# Altium PCB PCB_INDICATOR_DELAROSA_REV2_.PcbDoc
Units mm, origin at the board's own origin, x right, y up, seen from the top; angles counter-clockwise.
Board outline 78.61 x 49.91 mm, 2 copper layers (Top Layer, Bottom Layer), stack 1.57 mm thick; 40 components, 20 nets, 116 pads, 123 vias.
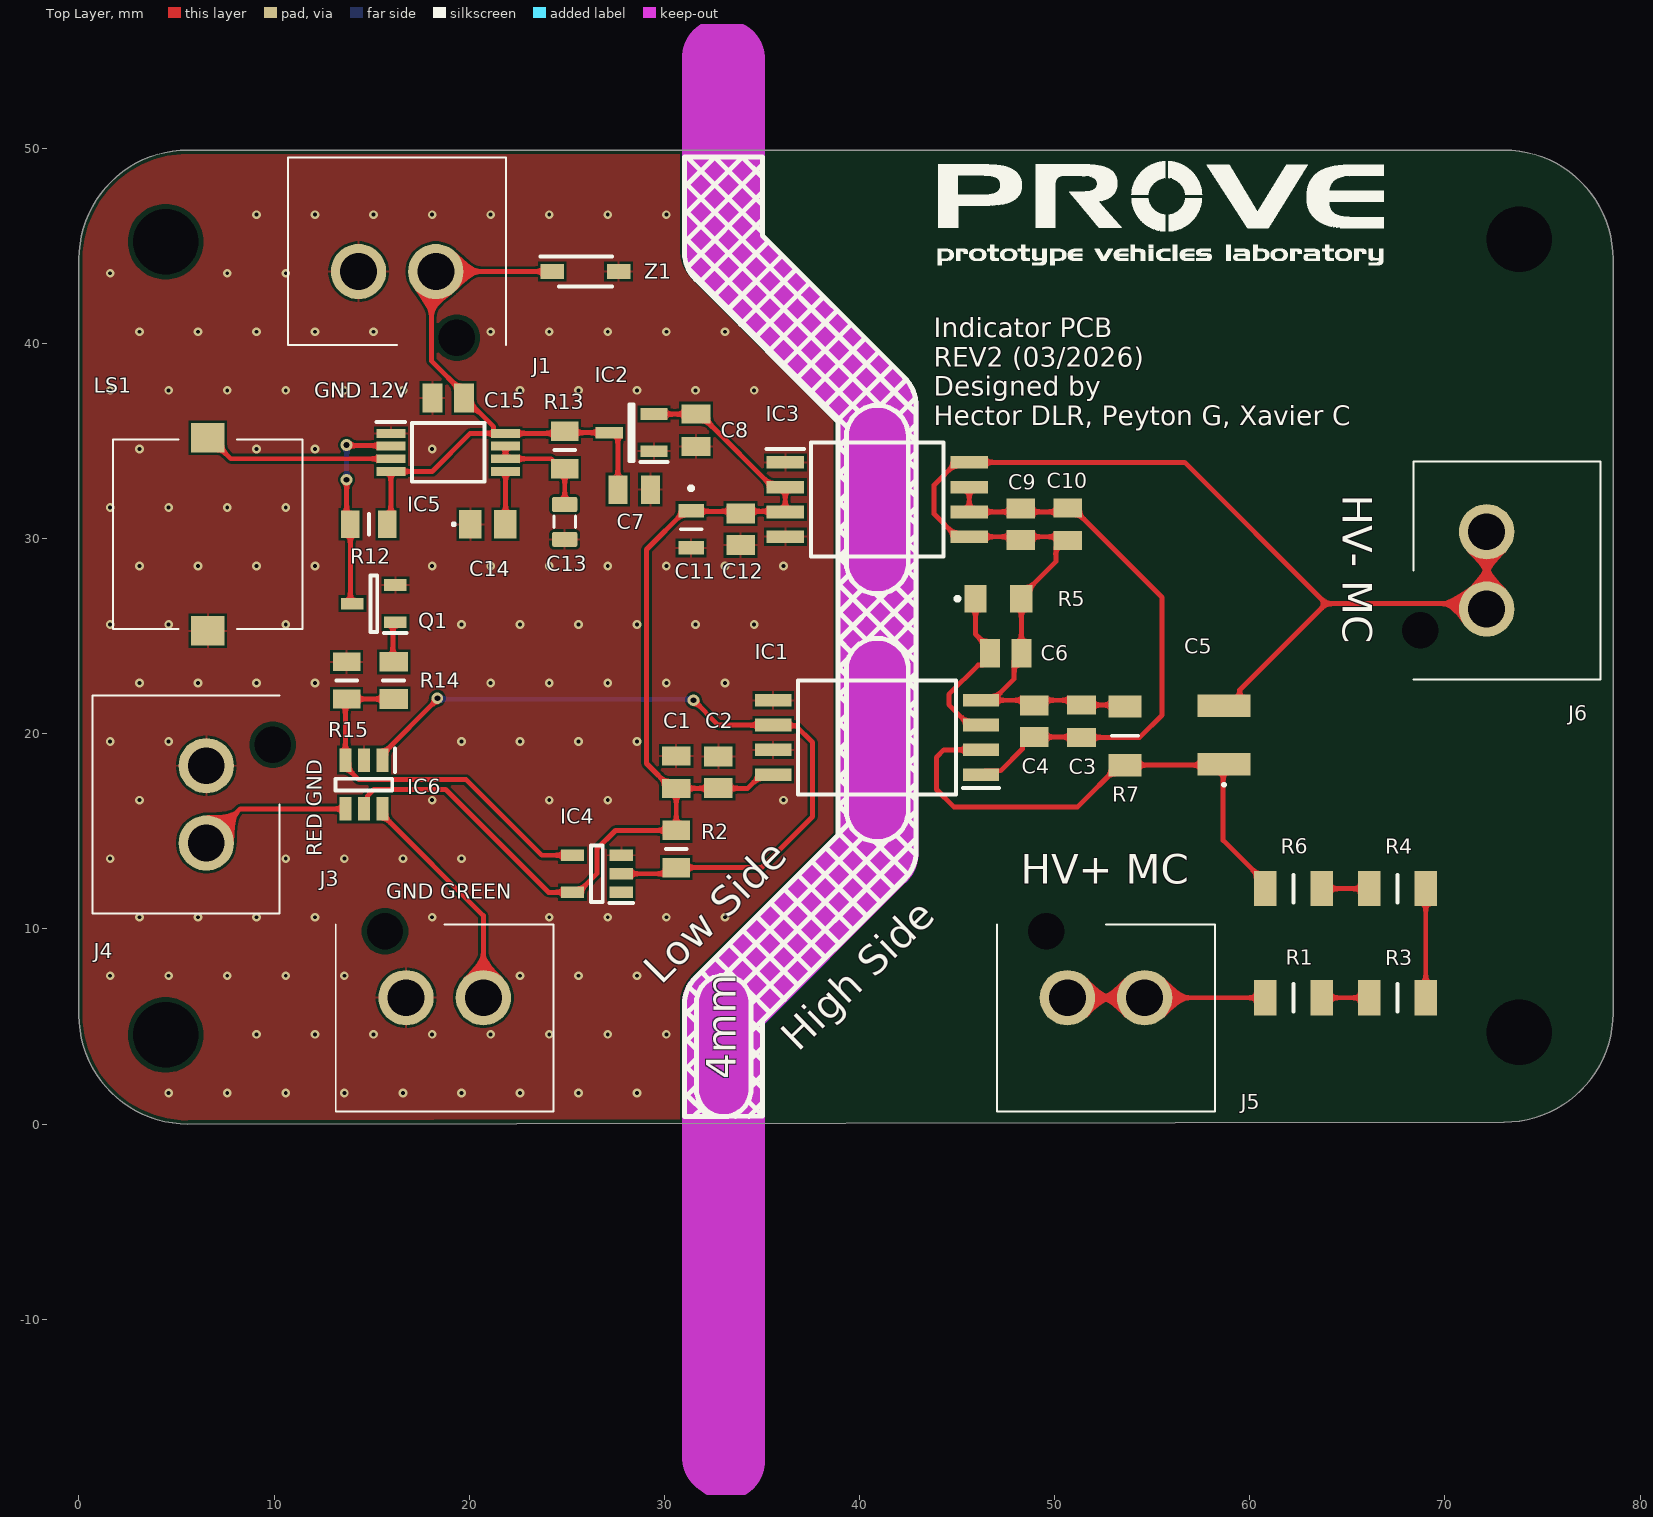
[diagram p0: Top Layer view]
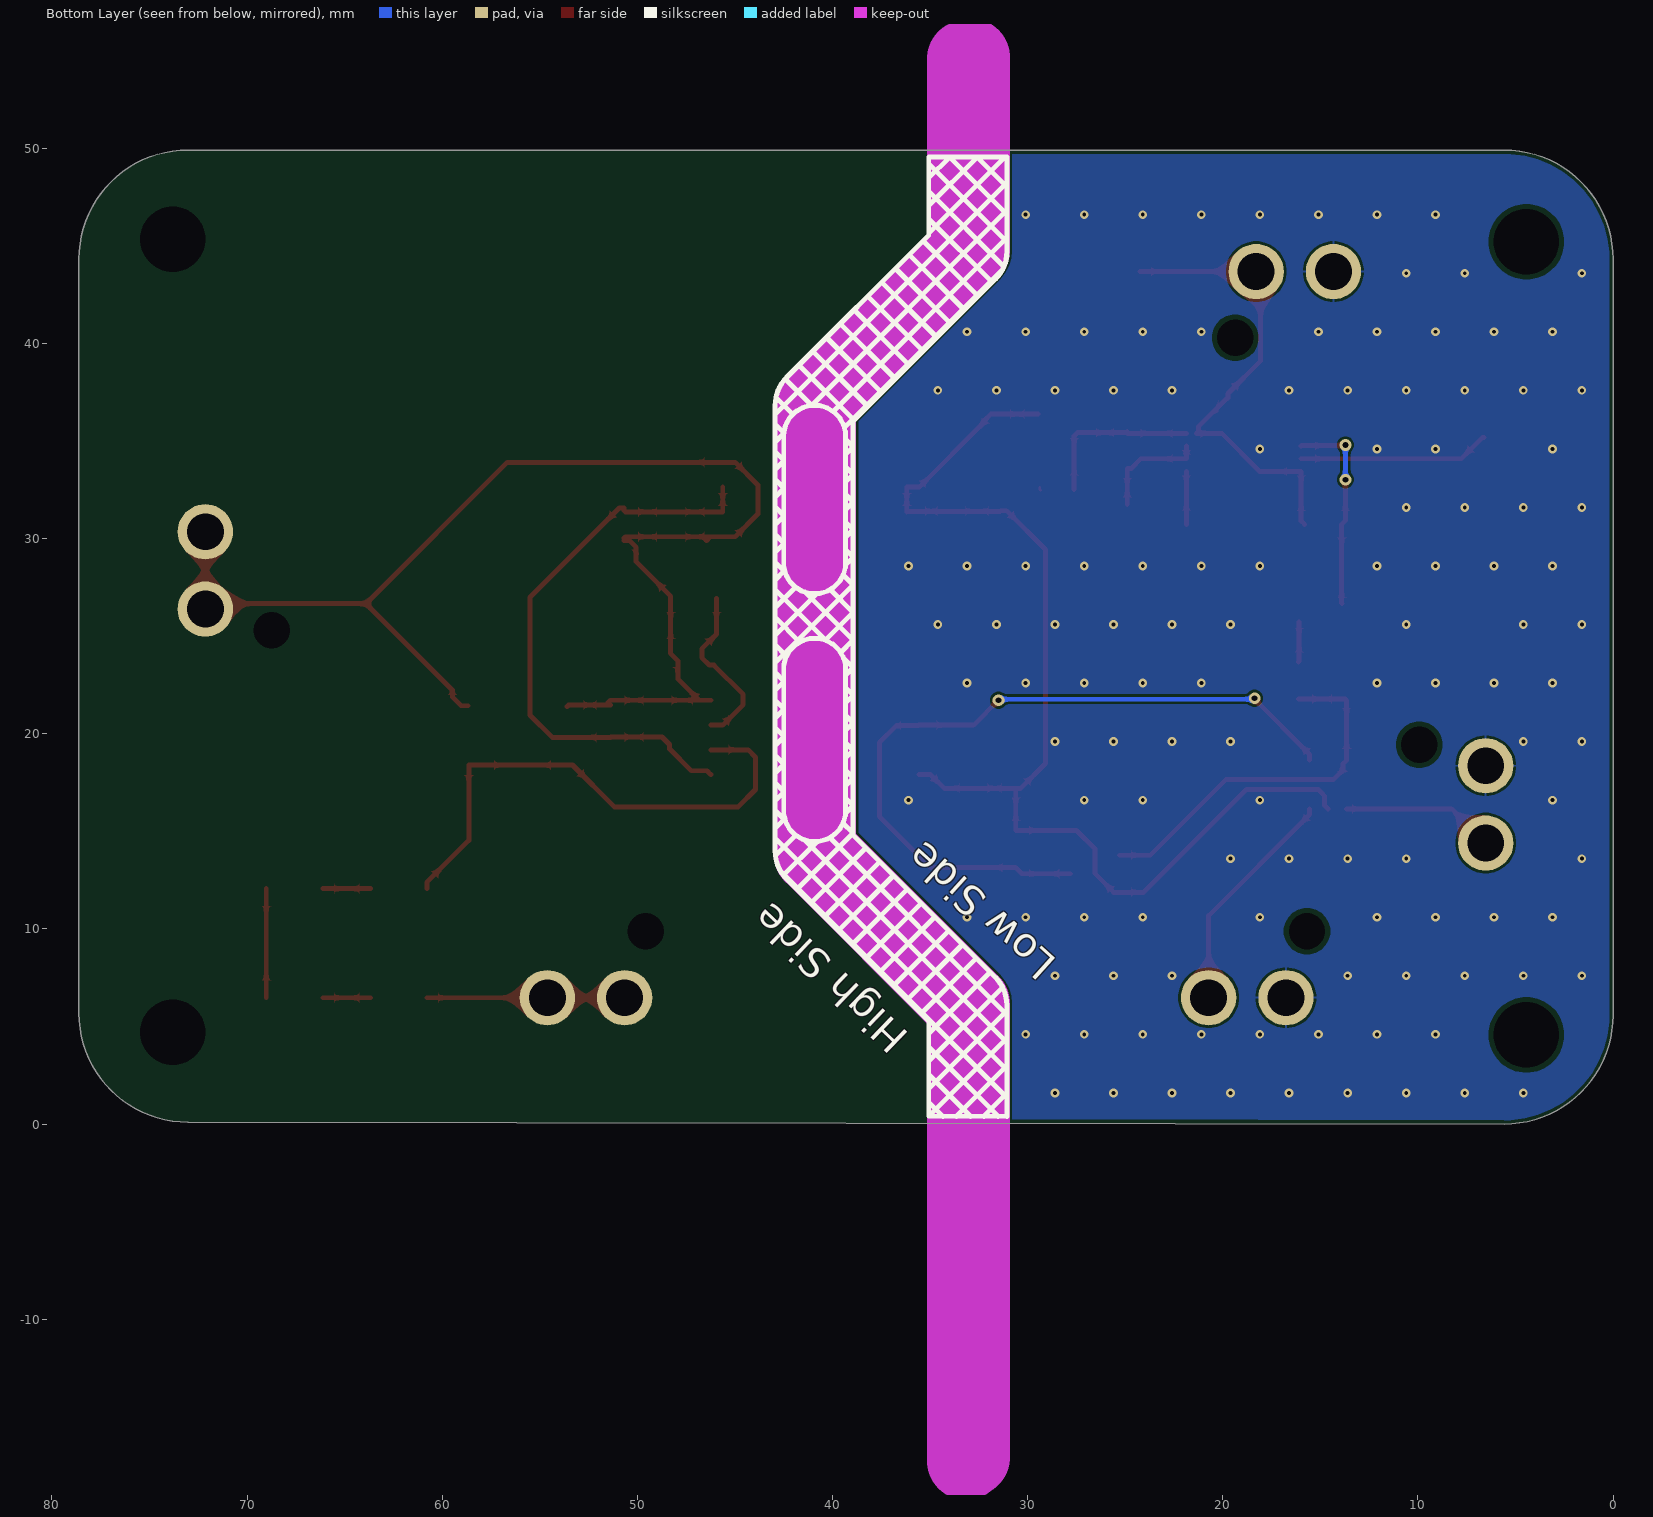
[diagram p1: Bottom Layer view, seen from below]
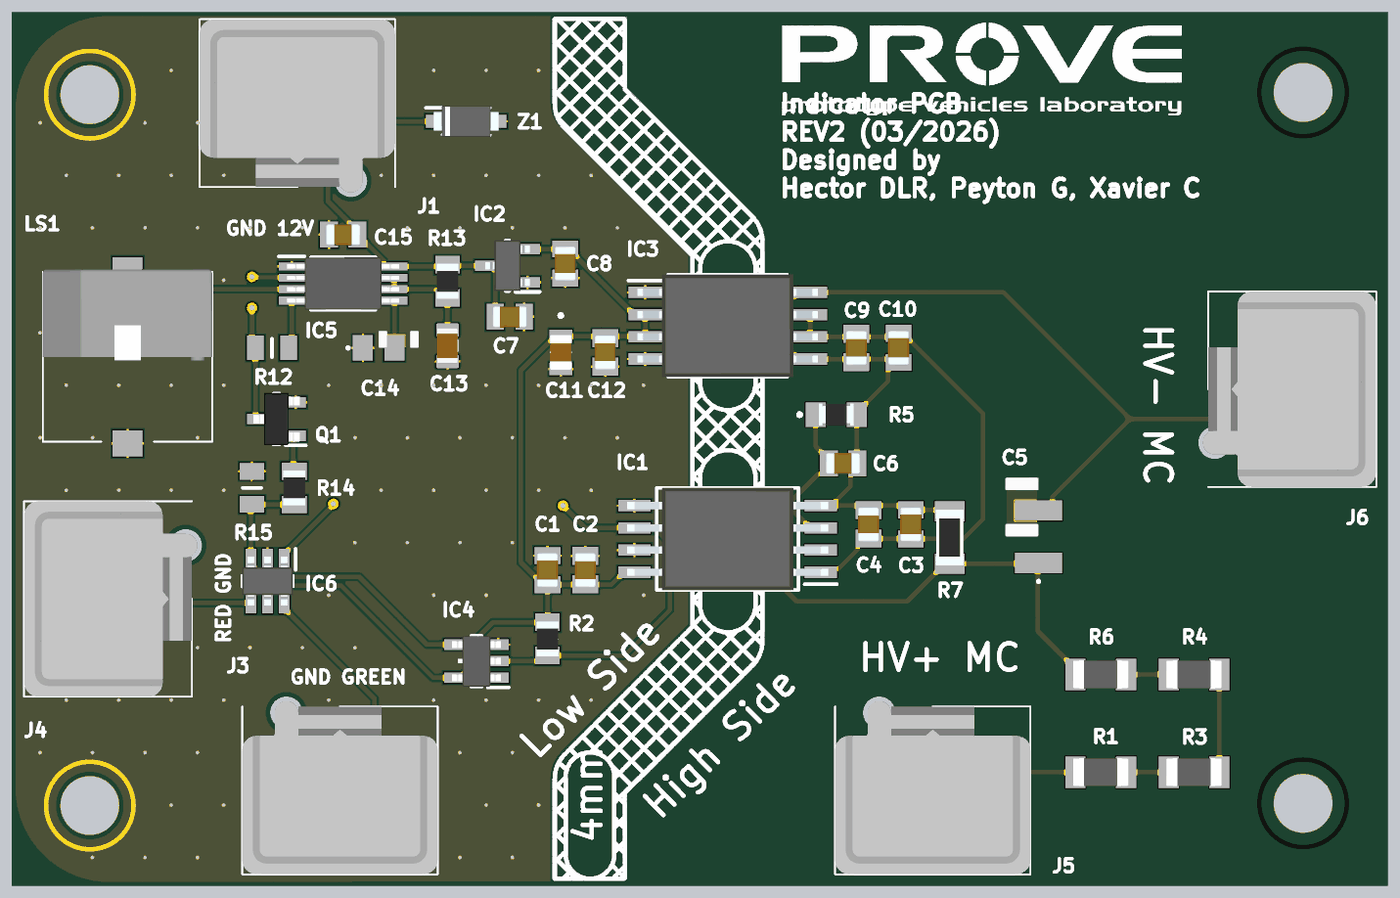
[diagram p2: 3D render of the assembled board from above, using the file's embedded part models]

## Layer stack, top to bottom
Top Solder: solder mask 0.0127, Solder Resist, Dk 3.8
Top Layer: signal copper 0.035
Dielectric: core 1.5, FR-4, Dk 4.5
Bottom Layer: signal copper 0.035
Bottom Solder: solder mask 0.0127, Solder Resist, Dk 3.8

## Board outline
0,5.588 0,44.323 cw(c5.588,44.323) 5.588,49.911 73.025,49.911 cw(c73.025,44.323) 78.613,44.323 78.613,5.685 cw(c73.025,5.685) 73.025,0.097 5.588,0 cw(c5.588,5.588)
cut-out: 39.663,28.765 ccw(c40.914,28.765) 42.164,28.765 42.164,35.242 ccw(c40.914,35.242) 39.663,35.242
cut-out: 39.663,16.066 ccw(c40.914,16.066) 42.164,16.066 42.164,23.304 ccw(c40.914,23.304) 39.663,23.304

## Design rules (kind name [scope] priority, off if disabled: settings)
BoardOutlineClearance [All] p1: gap=0.2 ignorepadtopadclearanceinfootprint=FALSE
Clearance [All] p1: gap=0.127 ignorepadtopadclearanceinfootprint=FALSE except(0.25: Arc-Hole Track-Hole SMDPad-Hole THPad-Hole Via-Hole Fill-Hole Poly-Hole Region-Hole Text-Hole)
ComponentClearance [All] p1: gap=0.127 collisioncheckmode=3 verticalgap=0.127 showdistances=TRUE
DiffPairsRouting [All] p1: maxlimit=0.254 minlimit=0.127 mostfreqgap=0.127 toplayer_minwidth=0.127 toplayer_maxwidth=25.4 toplayer_prefwidth=0.127 bottomlayer_minwidth=0.127 bottomlayer_maxwidth=25.4 bottomlayer_prefwidth=0.127 maxuncoupledlength=12.7
Height [All] p1: minheight=0 maxheight=1816.048 prefheight=12.7
HoleSize [All] p1: absolutevalues=TRUE maxlimit=6.3 minlimit=0.3 maxpercent=80.000 minpercent=20.000
HoleToHoleClearance [All] p1: gap=0.25 allowstackedmicrovias=FALSE
MinimumAnnularRing [All] p1: minimumring=0.076
MinimumSolderMaskSliver [All] p1: minsoldermaskwidth=0
PlaneClearance [All] p1: clearance=0.127
PlaneConnect PlaneConnectPowerPads [InPadClass('PowerPads')] p1: planeconnectstyle=Direct reliefexpansion=0.508 reliefentries=4 reliefconductorwidth=0.254 reliefairgap=0.254
PlaneConnect [All] p2: pad.planeconnectstyle=Relief pad.reliefexpansion=0.3 pad.reliefentries=4 pad.reliefconductorwidth=0.127 pad.reliefairgap=0.127 via.planeconnectstyle=Direct via.reliefexpansion=0.3 via.reliefentries=4 via.reliefconductorwidth=0.127 via.reliefairgap=0.127
PolygonConnect PolygonConnectPowerPads [All vs (InPadClass('PowerPads'))] p1: connectstyle=Direct reliefconductorwidth=0.254 reliefentries=4 polygonreliefangle="90 Angle" airgapwidth=0.254
PolygonConnect [All] p2: thpad.connectstyle=Relief thpad.reliefconductorwidth=0.127 thpad.reliefentries=4 thpad.polygonreliefangle="90 Angle" thpad.airgapwidth=0.127 smdpad.connectstyle=Relief smdpad.reliefconductorwidth=0.127 smdpad.reliefentries=4 smdpad.polygonreliefangle="90 Angle" smdpad.airgapwidth=0.127 via.connectstyle=Direct via.reliefconductorwidth=0.127 via.reliefentries=4 via.polygonreliefangle="90 Angle" via.airgapwidth=0.127
RoutingVias [All] p1: holewidth=0.3 width=0.6 viastyle="Through Hole" minholewidth=0.3 minwidth=0.6 maxholewidth=0.6 maxwidth=6.6
SilkToSilkClearance [All] p1: silktosilkclearance=0
SilkToSolderMaskClearance [IsPad] p1: minsilkscreentomaskgap=0.127 clearancetoexposedcopper=TRUE
SolderMaskExpansion [All] p1: expansion=0.075 istentingtop=FALSE
SupplyNets "Schematic Supply Nets" [InNet('GND')] p1: voltage=0.000
Width [All] p1: maxlimit=25.4 minlimit=0.127 preferedwidth=0.127 minimp=50.000000 maximp=50.000000 favimp=50.000000
20 further rules are at their usual default settings.

## Classes and differential pairs
component class "LED Logic": IC4 IC6 IC?
component class "555 Timer One-Shot": C13 C14 C15 IC5 LS1 Q1 R12 R13 R14 R15
component class "This is my D (Isolator) Schematic Document": C9 C10 C11 C12 IC3
component class "This is my C LDO (12V-5V) Schematic Document": C7 C8 IC2
component class "This is my A (AMC23C11) Schematic Document": C1 C2 C3 C4 C5 C6 IC1 R1 R2 R3 R4 R5 R6 R7
component class "This is my  B Connector Schematic Document": J1 J3 J4 J5 J6 Z1

## Components (designator, comment, footprint, x,y, rotation, side; value= is the part's Value field where it differs from the comment)
C1 "1u" CAPC2012X145N 30.607,18.034 r90 top
C2 "100n" CAPC2012X147N 32.766,18.034 r90 top
C3 "1u" CAPC2012X145N 51.372,20.645 r90 top
C4 "100n" CAPC2012X147N 48.959,20.645 r90 top
C5 "1nF" C1210 58.674,19.939 r90 top
C6 "100n" CAPC2012X147N 47.498,24.13 r0 top
C7 "1u" CAPC2012X145N 28.448,32.512 r0 top
C8 "1u" CAPC2012X145N 31.623,35.56 r90 top
C9 "100n" CAPC2012X147N 48.26,30.734 r270 top
C10 "22u" CAPC2012X145N 50.673,30.739 r270 top
C11 "10u" GRM21BR60J226ME39L 31.369,30.48 r270 top
C12 "100n" CAPC2012X147N 33.909,30.48 r270 top
C13 "Capacitor 100µF +/-20% 6.3V 0805" CAPC0805(2012)145_L 24.892,30.861 r90 top value=100µF
C14 "10nF" C0805 20.955,30.734 r0 top
C15 "100n" CAPC2012X147N 18.923,37.211 r180 top
IC1 "AMC23C11DWV" SOIC127P1150X280-8N 40.903,19.812 r180 top
IC2 "MCP1703AT-5002E_CB" SOT95P255X145-3N 28.321,35.433 r180 top
IC3 "MIE05W0505BGYE-3R-Z" SOIC127P1030X265-8N 40.907,32.004 r0 top
IC4 "SN74LVC1G04MDBVREP" SOT95P280X145-5N 26.543,12.827 r180 top
IC5 "NE555PWRE4" SOP65P640X120-8N 18.923,34.417 r0 top
IC6 "SN74LVC2G17DBVR" SOT95P280X145-6N 14.605,17.399 r270 top
J1 "1877285-2" 18772852 16.308,39.928 r180 top
J3 "1877285-2" 18772852 18.744,10.237 r0 top
J4 "1877285-2" 18772852 10.287,16.383 r270 top
J5 "1877285-2" 18772852 52.63,10.237 r0 top
J6 "1877285-2" 18772852 68.376,28.373 r90 top
LS1 "CMI-9705-85-SMT-TR" CMI970585SMTTR 6.604,30.226 r0 top
Q1 "2N7002K-7" SOT96P240X115-3N 15.113,26.67 r180 top
R1 "CRMA1206AF500KFKEF" RESC3216X74N 62.23,6.477 r0 top
R2 "4.7k" RESC2012X65N 30.607,14.097 r270 top
R3 "CRMA1206AF500KFKEF" RESC3216X74N 67.564,6.477 r0 top
R4 "CRMA1206AF500KFKEF" RESC3216X74N 67.564,12.065 r180 top
R5 "2k" ERJP06D1000V 47.117,26.924 r0 top
R6 "CRMA1206AF500KFKEF" RESC3216X74N 62.23,12.065 r180 top
R7 "RT73F2B10KBTD" RESC3216X70N 53.597,19.899 r90 top
R12 "10k" RESC2012X60N 14.859,30.734 r0 top
R13 "ESR10EZPF4702" RESC2012X65N 24.892,34.544 r90 top
R14 "1k" RESC2013X65N 16.129,22.733 r270 top
R15 "10k" RESC2012X60N 13.716,22.733 r90 top
Z1 "MMSZ5242B-7-F" SOD3716X145N 25.957,43.688 r0 top

## Footprints (in the part's own frame and the unit in brackets; to place one, negate y for a bottom-side part, rotate by r counter-clockwise, add the part's x,y. Pads: shape width x height; smd on the part's side, far side on the other; paste and mask are expansions set on the pad)
18772852 [mm]
  round 2.835 hole 1.89: 1(-1.98,-3.76) 2(1.98,-3.76)
  round 0.93 hole 1.86 unplated: 3(-3.06,-0.36)
  silkscreen extent -5.59,-9.6 5.59,0, body extent -5.59,-9.58 5.59,0.3, height 11.91
C0805 [mm]
  rect 1.15x1.45 smd: 1(-0.9,0) 2(0.9,0)
  silkscreen extent -1.8,-0.05 -1.7,0.05, body extent 0,0 2.3,0.98
C1210 [mm]
  rect 1.15x2.7 smd: 1(-1.5,0) 2(1.5,0)
  silkscreen extent -2.6,-0.05 -2.5,0.05, body extent 0,0 3.4,1.9
CAPC0805(2012)145_L [mm] "Chip Capacitor, Body 2.0x1.2mm, Height 1.45mm, IPC High Density"
  rrect25% 0.76x1.3 smd: 1(-0.9,0) 2(0.89,0)
  silkscreen extent -0.3,-0.55 0.3,0.55, body extent -1,-0.6 1,0.6, height 1.45
CAPC2012X145N [mm]
  rect 0.97x1.47 smd: 1(-0.83,0) 2(0.83,0)
  body extent -1,-0.63 1,0.63, height 1.45
CAPC2012X147N [mm]
  rect 1.02x1.47 smd: 1(-0.81,0) 2(0.81,0)
  body extent -1,-0.63 1,0.63, height 1.47
CMI970585SMTTR [mm]
  rect 1.7x1.5 smd: 1(0,4.95) 2(0,-4.95)
  silkscreen extent -4.85,-4.85 4.85,4.85, body extent -4.85,-0.2 4.85,5, height 5.05
ERJP06D1000V [mm]
  rect 1.15x1.4 smd: 1(-1.175,0) 2(1.175,0)
  silkscreen extent -2.2,-0.1 -2,0.1, body extent -1,-0.63 1,0.63, height 0.6
GRM21BR60J226ME39L [mm]
  rect 0.7x1.3 smd: 1(-0.95,0) 2(0.95,0)
  silkscreen extent -2.2,-0.53 0,0.53, body extent -1,-0.63 1,0.63, height 1
RESC2012X60N [mm]
  rect 0.95x1.4 smd: 1(-0.95,0) 2(0.95,0)
  silkscreen extent 0,-0.53 0,0.53
RESC2012X65N [mm]
  rect 1x1.4 smd: 1(-0.95,0) 2(0.95,0)
  silkscreen extent 0,-0.53 0,0.53, body extent -1,-0.63 1,0.63, height 0.65
RESC2013X65N [mm]
  rect 1x1.45 smd: 1(-0.95,0) 2(0.95,0)
  silkscreen extent 0,-0.54 0,0.54, body extent -1,-0.64 1,0.64, height 0.65
RESC3216X70N [mm]
  rect 1.15x1.7 smd: 1(-1.5,0) 2(1.5,0)
  silkscreen extent 0,-0.67 0,0.67, body extent -1.6,-0.8 1.6,0.8, height 0.6
RESC3216X74N [mm]
  rect 1.15x1.8 smd: 1(-1.45,0) 2(1.45,0)
  silkscreen extent 0,-0.7 0,0.7, body extent -1.59,-0.8 1.59,0.8, height 0.74
SOD3716X145N [mm]
  rect 1.2x0.75 smd: 1(-1.7,0) 2(1.7,0)
  silkscreen extent -2.3,-0.77 1.35,0.77, body extent -1.85,-0.89 1.85,0.89, height 1
SOIC127P1030X265-8N [mm]
  rect 1.925x0.65 smd: 1(-4.712,1.905) 2(-4.712,0.635) 3(-4.712,-0.635) 4(-4.712,-1.905) 5(4.712,-1.905) 6(4.712,-0.635) 7(4.712,0.635) 8(4.712,1.905)
  silkscreen extent -5.68,-2.93 3.4,2.93, body extent -5.15,-2.93 5.15,2.93, height 2.65
SOIC127P1150X280-8N [mm]
  rect 1.85x0.65 smd: 1(-5.325,1.905) 2(-5.325,0.635) 3(-5.325,-0.635) 4(-5.325,-1.905) 5(5.325,-1.905) 6(5.325,-0.635) 7(5.325,0.635) 8(5.325,1.905)
  silkscreen extent -6.25,-2.93 4.05,2.93, body extent -5.75,-2.93 5.75,2.93, height 2.8
SOP65P640X120-8N [mm]
  rect 1.475x0.45 smd: 1(-2.938,0.975) 2(-2.938,0.325) 3(-2.938,-0.325) 4(-2.938,-0.975) 5(2.938,-0.975) 6(2.938,-0.325) 7(2.938,0.325) 8(2.938,0.975)
  silkscreen extent -3.67,-1.5 1.85,1.55, body extent -3.21,-1.5 3.21,1.5, height 1.11
SOT95P255X145-3N [mm]
  rect 1.4x0.6 smd: 1(-1.15,0.95) 2(-1.15,-0.95) 3(1.15,0)
  silkscreen extent -1.85,-1.45 0.1,1.5, body extent -1.28,-1.45 1.28,1.45, height 1.45
SOT95P280X145-5N [mm]
  rect 1.2x0.6 smd: 1(-1.25,0.95) 2(-1.25,0) 3(-1.25,-0.95) 4(1.25,-0.95) 5(1.25,0.95)
  silkscreen extent -1.85,-1.45 0.3,1.5, body extent -1.4,-1.45 1.4,1.45, height 1.2
SOT95P280X145-6N [mm]
  rect 1.2x0.6 smd: 1(-1.25,0.95) 2(-1.25,0) 3(-1.25,-0.95) 4(1.25,-0.95) 5(1.25,0) 6(1.25,0.95)
  silkscreen extent -1.85,-1.45 0.3,1.6, body extent -1.4,-1.45 1.4,1.45, height 1.45
SOT96P240X115-3N [mm]
  rect 1.15x0.6 smd: 1(-1.1,0.96) 2(-1.1,-0.96) 3(1.1,0)
  silkscreen extent -1.68,-1.45 0.18,1.51, body extent -1.33,-1.5 1.33,1.5, height 1.1

## Part data
C1 C3 C7 C8: library part KGM21AV51H105ZU, "Capacitor", Manufacturer_Name="Kyocera AVX", Datasheet Link=https://www.mouser.com/datasheet/2/40/KGM_Y5V-3223189.pdf, Height=1.45mm, Manufacturer_Part_Number=KGM21AV51H105ZU
C2 C4 C6 C9 C12 C15: library part KGF21BR71H104KT, "Capacitor", Manufacturer_Name="Kyocera AVX", Mouser Part Number=581-KGF21BR71H104KT, Arrow Part Number=KGF21BR71H104KT, Arrow Price/Stock=https://www.arrow.com/en/products/kgf21br71h104kt/avx?utm_currency=USD&region=nac, Datasheet Link=https://www.mouser.fr/datasheet/2/40/KGF-3223650.pdf, Height=1.47mm, Manufacturer_Part_Number=KGF21BR71H104KT, Mouser Price/Stock=https://www.mouser.co.uk/ProductDetail/KYOCERA-AVX/KGF21BR71H104KT?qs=Jm2GQyTW%2FbjYyKCvVWAEOw%3D%3D
C5: library part C1210C102JDGACAUTO, "Capacitor", Manufacturer_Name="Yageo Group", Mouser Part Number=80-C1210C102JDGAUTO, Datasheet Link=https://www.yageogroup.com/content/datasheet/asset/file/KEM_C1080_C0G_HV_AUTO_SMD, Manufacturer_Part_Number=C1210C102JDGACAUTO, Mouser Price/Stock=https://www.mouser.co.uk/ProductDetail/KEMET/C1210C102JDGACAUTO?qs=f9yNj16SXrIz1%252BjZlRLS%2FQ%3D%3D
C10: library part GXT21BR61C226ME13L, "Capacitor", Manufacturer_Name="Murata Electronics", Datasheet Link=https://www.murata.com/en-global/products/productdetail?partno=GXT21BR61C226ME13%23, Height=1.45mm, Manufacturer_Part_Number=GXT21BR61C226ME13L
C11: library part GRM21BR61H106KE43L, "Capacitor", Manufacturer_Name="Murata Electronics", Mouser Part Number=81-GRM21BR61H106KE3L, Arrow Part Number=GRM21BR61H106KE43L, Arrow Price/Stock=https://www.arrow.com/en/products/grm21br61h106ke43l/murata-manufacturing?utm_currency=USD&region=europe, Datasheet Link=https://search.murata.co.jp/Ceramy/image/img/A01X/G101/ENG/GRM21BR61H106KE43-01A.pdf, Height=1.45mm, Manufacturer_Part_Number=GRM21BR61H106KE43L, Mouser Price/Stock=https://www.mouser.co.uk/ProductDetail/Murata-Electronics/GRM21BR61H106KE43L?qs=lYGu3FyN48cBZlIduWKclg%3D%3D
C13: library part CMP-001-00054-4, "Chip Capacitor, 100µF +/-20%, 6.3V, 0805, Thickness 1.45 mm", Case/Package=0805, Max Operating Temperature=85°C, Min Operating Temperature=-55°C, Tolerance=10%, Voltage Rating=6.3V, Mounting Technology=SMT, Pins=2
C14: library part C0805C103F1GACAUTO, "Capacitor", Manufacturer_Name="Yageo Group", Mouser Part Number=80-C0805C103F1GAUTO, Arrow Part Number=C0805C103F1GACAUTO, Arrow Price/Stock=https://www.arrow.com/en/products/c0805c103f1gacauto/kemet-corporation?utm_currency=USD&region=nac, Datasheet Link=https://www.yageogroup.com/content/datasheet/asset/file/KEM_C1022_C0G_AUTO_SMD, Height=1.1mm, Manufacturer_Part_Number=C0805C103F1GACAUTO, Mouser Price/Stock=https://www.mouser.co.uk/ProductDetail/KEMET/C0805C103F1GACAUTO?qs=SKxV22VtNmdH%252BCKBcUCnZA%3D%3D
IC1: "Integrated Circuit", Manufacturer_Name="Texas Instruments", Mouser Part Number=595-AMC23C11DWV, Arrow Part Number=AMC23C11DWV, Arrow Price/Stock=https://www.arrow.com/en/products/amc23c11dwv/texas-instruments?utm_currency=USD&region=nac, Datasheet Link=https://www.ti.com/lit/ds/symlink/amc23c11.pdf, Height=2.8mm, Manufacturer_Part_Number=AMC23C11DWV, Mouser Price/Stock=https://www.mouser.co.uk/ProductDetail/Texas-Instruments/AMC23C11DWV?qs=By6Nw2ByBD0b%2FD7l%2FEQWqQ%3D%3D
IC2: "Integrated Circuit", Arrow Part Number=MCP1703AT-5002E/CB, Manufacturer_Name=Microchip, Mouser Part Number=579-MCP1703AT5002ECB, Arrow Price/Stock=https://www.arrow.com/en/products/mcp1703at-5002ecb/microchip-technology?utm_currency=USD&region=nac, Datasheet Link=http://uk.rs-online.com/web/p/products/7709511, Height=1.45mm, Manufacturer_Part_Number=MCP1703AT-5002E/CB, Mouser Price/Stock=https://www.mouser.co.uk/ProductDetail/Microchip-Technology/MCP1703AT-5002E-CB?qs=PZkJWYMe7lfGlNu7PCEqfg%3D%3D
IC3: "Integrated Circuit", Manufacturer_Name="Monolithic Power Systems (MPS)", Datasheet Link=https://www.monolithicpower.com/en/documentview/productdocument/index/version/2/document_type/Datasheet/lang/en/sku/MIE05W0505BGYE/document_id/11798/, Height=2.65mm, Manufacturer_Part_Number=MIE05W0505BGYE-3R-Z
IC4: "Integrated Circuit", Manufacturer_Name="Texas Instruments", Mouser Part Number=595-SN74LVC04MDBVREP, Arrow Part Number=SN74LVC1G04MDBVREP, Arrow Price/Stock=https://www.arrow.com/en/products/sn74lvc1g04mdbvrep/texas-instruments?utm_currency=USD&region=nac, Datasheet Link=http://www.ti.com/lit/gpn/sn74lvc1g04-ep, Height=1.45mm, Manufacturer_Part_Number=SN74LVC1G04MDBVREP, Mouser Price/Stock=https://www.mouser.co.uk/ProductDetail/Texas-Instruments/SN74LVC1G04MDBVREP?qs=l4wu3mKjyflWQOlEvZuvmw%3D%3D
IC5: "Integrated Circuit", Manufacturer_Name="Texas Instruments", Mouser Part Number=595-NE555PWRE4, Arrow Part Number=NE555PWRE4, Arrow Price/Stock=https://www.arrow.com/en/products/ne555pwre4/texas-instruments, Datasheet Link=http://www.ti.com/lit/ds/symlink/ne555.pdf, Height=1.2mm, Manufacturer_Part_Number=NE555PWRE4, Mouser Price/Stock=https://www.mouser.co.uk/ProductDetail/Texas-Instruments/NE555PWRE4?qs=rLYyFdxB%2Fmr6qUodVTnTjw%3D%3D
IC6: "Integrated Circuit", Manufacturer_Name="Texas Instruments", Mouser Part Number=595-SN74LVC2G17DBVR, Arrow Part Number=SN74LVC2G17DBVR, Arrow Price/Stock=https://www.arrow.com/en/products/sn74lvc2g17dbvr/texas-instruments?utm_currency=USD&region=nac, Datasheet Link=http://www.ti.com/lit/gpn/sn74lvc2g17, Height=1.45mm, Manufacturer_Part_Number=SN74LVC2G17DBVR, Mouser Price/Stock=https://www.mouser.co.uk/ProductDetail/Texas-Instruments/SN74LVC2G17DBVR?qs=X1HXWTtiZ0RnstCufGEJxQ%3D%3D
J1 J3 J4 J5 J6: "Connector", Manufacturer_Name="TE Connectivity", Mouser Part Number=571-1877285-2, Arrow Part Number=1877285-2, Arrow Price/Stock=https://www.arrow.com/en/products/1877285-2/te-connectivity?region=europe, Datasheet Link=https://www.te.com/commerce/DocumentDelivery/DDEController?Action=srchrtrv&DocNm=7-1773458-5_ECONOMY_POWER_QRG&DocType=Data%20Sheet&DocLang=English&PartCntxt=1877285-2&DocFormat=pdf, Height=12mm, Manufacturer_Part_Number=1877285-2, Mouser Price/Stock=https://www.mouser.co.uk/ProductDetail/TE-Connectivity/1877285-2?qs=ka3zfMQDmFlAIZq5pDt5JA%3D%3D
LS1: "Loudspeaker or Buzzer", Manufacturer_Name="Same Sky", Mouser Part Number=490-CMI-9705-85SMTTR, Arrow Part Number=CMI-9705-85-SMT-TR, Arrow Price/Stock=https://www.arrow.com/en/products/cmi-9705-85-smt-tr/cui-devices?region=nac, Datasheet Link=https://www.sameskydevices.com/product/resource/CMI-9705-85-SMT-TR.pdf, Height=5.5mm, Manufacturer_Part_Number=CMI-9705-85-SMT-TR, Mouser Price/Stock=https://www.mouser.co.uk/ProductDetail/CUI-Devices/CMI-9705-85-SMT-TR?qs=P1JMDcb91o4Wun0lW9vptg%3D%3D
Q1: "MOSFET (N-Channel)", Manufacturer_Name="Diodes Incorporated", Mouser Part Number=621-2N7002K-7, Arrow Part Number=2N7002K-7, Arrow Price/Stock=https://www.arrow.com/en/products/2n7002k-7/diodes-incorporated.html?utm_currency=USD&region=nac, Datasheet Link=https://www.diodes.com//assets/Datasheets/2N7002K.pdf, Height=1.15mm, Manufacturer_Part_Number=2N7002K-7, Mouser Price/Stock=https://www.mouser.co.uk/ProductDetail/Diodes-Incorporated/2N7002K-7?qs=rGAXPo9uwV0%2Fp9r5KJ7huA%3D%3D
R1 R3 R4 R6: "Resistor", Manufacturer_Name=Vishay, Mouser Part Number=71-CRMA1206AF500KFKF, Arrow Part Number=CRMA1206AF500KFKEF, Arrow Price/Stock=https://www.arrow.com/en/products/crma1206af500kfkef/vishay?region=nac, Datasheet Link=https://www.vishay.com/docs/68043/crma.pdf, Height=0.74mm, Manufacturer_Part_Number=CRMA1206AF500KFKEF, Mouser Price/Stock=https://www.mouser.co.uk/ProductDetail/Vishay-Techno/CRMA1206AF500KFKEF?qs=1mbolxNpo8cDdncTsqghaQ%3D%3D
R2: library part CRG0805J4K7, "Resistor", Manufacturer_Name="TE Connectivity", Mouser Part Number=279-CRG0805J4K7, Arrow Part Number=CRG0805J4K7, Arrow Price/Stock=https://www.arrow.com/en/products/crg0805j4k7/te-connectivity, Datasheet Link=https://www.te.com/commerce/DocumentDelivery/DDEController?Action=srchrtrv&DocNm=1773204&DocType=Data%20Sheet&DocLang=English&PartCntxt=1623378-1&DocFormat=pdf, Height=0.65mm, Manufacturer_Part_Number=CRG0805J4K7, Mouser Price/Stock=https://www.mouser.co.uk/ProductDetail/TE-Connectivity-Holsworthy/CRG0805J4K7?qs=8G8kQhBkhGgMmCk94lgNPw%3D%3D
R5: library part ERJ-P06F2001V, "Resistor", Manufacturer_Name=Panasonic, Mouser Part Number=667-ERJ-P06F2001V, Arrow Part Number=ERJ-P06F2001V, Arrow Price/Stock=https://www.arrow.com/en/products/erjp06f2001v/panasonic?region=nac, Datasheet Link=http://industrial.panasonic.com/cdbs/www-data/pdf/RDA0000/AOA0000C102.pdf, Height=0.7mm, Manufacturer_Part_Number=ERJ-P06F2001V, Mouser Price/Stock=https://www.mouser.co.uk/ProductDetail/Panasonic/ERJ-P06F2001V?qs=iIVTEDlrHA33HmjCRTb3vw%3D%3D
R7: "Resistor", Manufacturer_Name="TE Connectivity", Datasheet Link=https://www.te.com/commerce/DocumentDelivery/DDEController?Action=showdoc&DocId=Data+Sheet%7F1773450%7FA1%7Fpdf%7FEnglish%7FENG_DS_1773450_A1.pdf%7FCAT-F52-R, Height=0.7mm, Manufacturer_Part_Number=RT73F2B10KBTD
R12 R15: library part RV0805JR-0710KL, "Resistor", Manufacturer_Name="Yageo Group", Datasheet Link=https://www.mouser.in/new/yageo/yageo-rv-resistors/, Height=0.6mm, Manufacturer_Part_Number=RV0805JR-0710KL
R13: "Resistor", Manufacturer_Name="ROHM Semiconductor", Mouser Part Number=755-ESR10EZPF4702, Datasheet Link=http://uk.rs-online.com/web/p/products/1674355, Height=0.65mm, Manufacturer_Part_Number=ESR10EZPF4702, Mouser Price/Stock=https://www.mouser.com/Search/Refine.aspx?Keyword=755-ESR10EZPF4702
R14: library part WCR0805LF1001FPLT, "Resistor", Manufacturer_Name="TT Electronics", Mouser Part Number=66-WCR0805LF1001FPLT, Datasheet Link=https://g.componentsearchengine.com/Datasheets/1/WCR0805LF1001FPLT.pdf, Height=0.65mm, Manufacturer_Part_Number=WCR0805LF1001FPLT, Mouser Price/Stock=https://www.mouser.com/Search/Refine.aspx?Keyword=66-WCR0805LF1001FPLT
Z1: "Zener Diode", Manufacturer_Name="Diodes Incorporated", Mouser Part Number=621-MMSZ5242B-F, Arrow Part Number=MMSZ5242B-7-F, Arrow Price/Stock=https://www.arrow.com/en/products/mmsz5242b-7-f/diodes-incorporated?utm_currency=USD&region=nac, Datasheet Link=https://www.diodes.com//assets/Datasheets/ds18010.pdf, Height=1.45mm, Manufacturer_Part_Number=MMSZ5242B-7-F, Mouser Price/Stock=https://www.mouser.co.uk/ProductDetail/Diodes-Incorporated/MMSZ5242B-7-F?qs=q1%252B6u8LlB5fEENM1dXHh%252Bg%3D%3D

## Free pads (board coordinates)
  round 1.524 hole 3.35: 1(4.445,45.212) 2(4.445,4.572) 4(73.8,4.699) 4(73.8,45.339)

## Via types
v1: diameter 0.45, hole 0.2, Top Layer to Bottom Layer, tented both sides, 119 vias
v2: diameter 0.6, hole 0.3, Top Layer to Bottom Layer, 4 vias

## Nets (pads, with @x,y where several pads share a name; then routed paths per layer and width w, separated by ;. In a path a pad name is that pad's centre, name@x,y a point inside that pad or via, vN(x,y) a via of type N, cw(c..) or ccw(c..) an arc to the next point about the centre after c; other vN are vias at no path point)
5V: C1.1 C2.1 C8.2 C11.1 C12.1 IC1.8 IC2.2 IC3.2 IC3.3 IC4.5 IC6.5 R2.1 | length 58.9
  Top Layer w0.25: IC6.5 14.78,16.324 14.78,16.806 14.859,16.885 14.859,16.891 15.113,17.145 18.796,17.145 24.064,11.877 25.593,11.877 26.543,12.827 26.543,14.097 27.493,15.047 R2.1 C1.1 ; IC2.2 31.616,36.383 C8.2 31.873,36.39 32.233,36.03 32.233,35.964 35.558,32.639 IC3.2 IC3.3 36.164,31.4 33.909,31.4 31.4,31.4 C11.1 31.069,31.43 29.083,29.444 29.083,18.478 30.357,17.204 C1.1 ; IC1.8 34.978,17.907 34.275,17.204 32.766,17.204 C1.1
"5V (High Side)": C3.1 C4.1 C9.1 C10.1 IC1.1 IC3.6 IC3.7 | length 29.8
  Top Layer w0.25: IC3.7 IC3.6 50.6,31.369 C10.1@50.673,31.442 ; IC1.1 46.428,18.107 47.231,18.107 48.349,19.225 48.349,19.45 48.734,19.835 C4.1 51.352,19.835 C3.1 54.359,19.815 55.499,20.955 55.499,26.993 50.923,31.569 C10.1
12V: C7.1 C15.1 IC2.3 IC5.4 IC5.8 J1.1 R12.2 R13.2 Z1.1 | length 33.2
  Top Layer w0.25: R12.2 15.985,30.91 IC5.4 18.097,33.442 20.047,35.392 IC5.8@21.248,35.392 ; C15.1 19.733,37.436 18.063,39.106 18.063,43.463 J1.1 Z1.1 ; C15.1@19.733,37.24 21.248,35.725 21.248,35.492 IC5.8@21.348,35.392 ; IC5.8 R13.2@24.892,35.392 ; R13.2 24.953,35.433 IC2.3 27.443,35.433 27.618,35.258 C7.1
555_Enable: IC4.4 IC6.3 R14.2 R15.1 | length 19.4
  Top Layer w0.25: R14.2 R15.1 13.655,21.722 IC6.3 13.83,18.474 13.83,18.168 14.345,17.653 19.837,17.653 23.713,13.777 IC4.4
AMC_IN: C5.1 IC1.2 R6.2 R7.1 | length 27.3
  Top Layer w0.25: IC1.2 44.323,19.177 43.942,18.796 43.942,17.145 44.831,16.256 51.179,16.256 53.322,18.399 R7.1 58.634,18.399 58.634,14.536 60.78,12.39 R6.2
AMC_OUT: IC1.6 IC4.2 IC6.1 R2.2 | length 39.3
  Top Layer w0.25: IC6.1 15.555,18.949 18.367,21.761 v2(18.367,21.822) ; IC4.2 30.287,12.827 R2.2 34.991,13.147 37.592,15.748 37.592,19.558 36.732,20.418 35.607,20.418 IC1.6 32.766,20.447 v2(31.496,21.717)
  Bottom Layer w0.25: v2(18.367,21.822) 18.419,21.77 31.443,21.77 v2(31.496,21.717)
CONT: C14.2 IC5.5 | length 2.7
  Top Layer w0.25: C14.2 21.861,30.74 IC5.5
GND: C1.2 C2.2 C7.2 C8.1 C11.2 C12.2 C13.1 C14.1 C15.2 IC1.5 IC1.7 IC2.1 IC3.1 IC3.4 IC4.3 IC5.1 IC6.2 J1.2 J3.1 J4.1 LS1.2 Q1.2 R15.2 Z1.2 | length 0.2
  Top Layer w0.127: C7.2@29.337,32.476 29.373,32.512 C7.2@29.373,32.637
  other v1: 4.6,1.6 7.6,1.6 10.6,1.6 13.6,1.6 16.6,1.6 19.6,1.6 22.6,1.6 25.6,1.6 28.6,1.6 9.1,4.6 12.1,4.6 15.1,4.6 18.1,4.6 21.1,4.6 24.1,4.6 27.1,4.6 30.1,4.6 1.6,7.6 4.6,7.6 7.6,7.6 10.6,7.6 13.6,7.6 22.6,7.6 25.6,7.6 28.6,7.6 3.1,10.6 6.1,10.6 9.1,10.6 12.1,10.6 18.1,10.6 24.1,10.6 27.1,10.6 30.1,10.6 33.1,10.6 1.6,13.6 10.6,13.6 13.6,13.6 16.6,13.6 19.6,13.6 3.1,16.6 18.1,16.6 24.1,16.6 27.1,16.6 36.1,16.6 1.6,19.6 4.6,19.6 19.6,19.6 22.6,19.6 25.6,19.6 28.6,19.6 3.1,22.6 6.1,22.6 9.1,22.6 12.1,22.6 21.1,22.6 24.1,22.6 27.1,22.6 30.1,22.6 33.1,22.6 1.6,25.6 4.6,25.6 10.6,25.6 19.6,25.6 22.6,25.6 25.6,25.6 28.6,25.6 31.6,25.6 34.6,25.6 3.1,28.6 6.1,28.6 9.1,28.6 12.1,28.6 18.1,28.6 21.1,28.6 24.1,28.6 27.1,28.6 30.1,28.6 33.1,28.6 36.1,28.6 1.6,31.6 4.6,31.6 7.6,31.6 10.6,31.6 3.1,34.6 9.1,34.6 12.1,34.6 18.1,34.6 1.6,37.6 4.6,37.6 7.6,37.6 10.6,37.6 13.6,37.6 16.6,37.6 22.6,37.6 25.6,37.6 28.6,37.6 31.6,37.6 34.6,37.6 3.1,40.6 6.1,40.6 9.1,40.6 12.1,40.6 15.1,40.6 21.1,40.6 24.1,40.6 27.1,40.6 30.1,40.6 33.1,40.6 1.6,43.6 7.6,43.6 10.6,43.6 9.1,46.6 12.1,46.6 15.1,46.6 18.1,46.6 21.1,46.6 24.1,46.6 27.1,46.6 30.1,46.6
GREEN_LEDS: IC6.6 J3.2 | length 11.8
  Top Layer w0.25: IC6.6 15.555,15.849 20.724,10.68 J3.2
HV+: J5.1 J5.2 R1.1 | length 10.1
  Top Layer w0.25: J5.1 J5.2 R1.1
HV-: C3.2 C4.2 C5.2 C6.2 C9.2 C10.2 IC1.4 IC3.5 IC3.8 J6.1 J6.2 R5.2 R7.2 | length 70.1
  Top Layer w0.25: IC1.4 IC1.4@46.828,21.717 ; IC3.5@46.456,29.899 IC3.5@46.256,30.099 ; C10.2 50.423,29.909 50.063,29.549 50.063,28.82 48.292,27.049 R5.2 48.292,24.146 C6.2 47.923,23.745 47.923,22.812 IC1.4@46.828,21.717 ; C10.2@50.673,30.036 50.61,30.099 IC3.5@46.256,30.099 ; C3.2 53.521,21.475 R7.2 ; C3.2@51.499,21.602 51.384,21.717 IC1.4@46.828,21.717 ; C5.2 59.028,21.439 59.478,21.889 59.478,22.243 63.905,26.67 ; J6.2 J6.1 71.859,26.67 63.905,26.67 ; IC3.5@46.256,30.099 IC3.5 44.982,30.099 43.815,31.266 43.815,32.742 44.982,33.909 IC3.8 56.666,33.909 63.905,26.67
NetC6_1: C6.1 IC1.3 R5.1 | length 8.8
  Top Layer w0.25: R5.1 45.942,25.101 46.688,24.355 C6.1 46.688,23.905 46.303,23.52 46.078,23.52 44.577,22.019 44.577,21.498 45.628,20.447 IC1.3
NetQ1_1: Q1.1 R14.1 | length 2.1
  Top Layer w0.25: Q1.1@16.086,25.72 16.086,23.726 R14.1
NetR1_2: R1.2 R3.1 | length 2.4
  Top Layer w0.25: R1.2 R3.1
NetR3_2: R3.2 R4.1 | length 5.6
  Top Layer w0.25: R3.2 R4.1
NetR4_2: R4.2 R6.1 | length 2.4
  Top Layer w0.25: R6.1 R4.2
OUT: IC5.3 LS1.1 | length 9.8
  Top Layer w0.25: LS1.1 6.704,35.176 7.788,34.092 IC5.3
RED_LEDS: IC6.4 J4.2 | length 7.9
  Top Layer w0.25: J4.2 8.273,16.149 IC6.4
TH/DS: C13.2 IC5.6 IC5.7 R13.1 | length 5.7
  Top Layer w0.25: IC5.7 IC5.6 24.194,34.092 24.692,33.594 R13.1 C13.2
TRIG: IC5.2 Q1.3 R12.1 | length 10.4
  Top Layer w0.25: v2(13.716,33.02) 13.716,30.927 R12.1 13.909,26.693 Q1.3@13.886,26.67 ; v2(13.716,34.798) 13.744,34.77 15.957,34.77 IC5.2
  Bottom Layer w0.25: v2@13.716,33.147 v2(13.716,34.798)
pads on no net: IC4.1 J1.3 J3.3 J4.3 J5.3 J6.3

## Polygon pours and split planes (outlines as drawn)
no net on Top Overlay "NONET_L-01_P-001" (hatched 45Degree grid 1 track 0.254): 31.02,-17.145 31.02,6.096 cw(c33.02,6.096) 31.606,7.51 38.894,14.799 38.894,36.001 31.606,43.29 cw(c33.02,44.704) 31.02,44.704 31.02,54.61 cw(c33.02,54.61) 35.02,54.61 35.02,45.533 42.308,38.244 cw(c40.894,36.83) 42.894,36.83 42.894,13.97 cw(c40.894,13.97) 42.308,12.556 35.02,5.267 35.02,-17.145 cw(c33.02,-17.145)
GND on Top Layer "GND_L01_P006" (solid, pour order 6): 0,0 -0.127,0.127 -0.127,50.165 33.147,50.165 33.147,44.323 40.386,36.957 40.386,14.224 33.395,7.233 33.147,0
no net on Bottom Overlay "NONET_L-01_P-001" (hatched 45Degree grid 1 track 0.254): 31.065,-17.134 31.065,6.107 cw(c33.065,6.107) 31.651,7.521 38.939,14.809 38.939,36.012 31.651,43.3 cw(c33.065,44.715) 31.065,44.715 31.065,54.621 cw(c33.065,54.621) 35.066,54.621 35.066,45.543 42.354,38.255 cw(c40.939,36.841) 42.94,36.841 42.94,13.981 cw(c40.939,13.981) 42.354,12.566 35.066,5.278 35.066,-17.134 cw(c33.065,-17.134)
GND on Bottom Layer "GND_L02_P009" (solid, pour order 9): 0,0 -0.127,0.127 -0.127,50.165 33.147,50.165 33.147,44.323 40.386,36.957 40.386,14.224 33.395,7.233 33.147,0

## Keep-outs
Keep-Out Layer:
  lines w4: 32.914,-17.071 32.914,6.17 40.788,14.044 40.788,36.904 32.914,44.778 32.914,54.684 ; 33.147,-17.272 33.147,5.969 41.021,13.843 41.021,36.703 33.147,44.577 33.147,54.483 ; 33.147,-17.145 33.147,6.096 41.021,13.97 41.021,36.83 33.147,44.704 33.147,54.61

## Silkscreen, mask and mechanical layers (free items; w line width, h text height)
Top Overlay:
  drawing of 37 lines, arcs and shapes, not listed
  text "GND 12V" at 12.065,37.211 h0.76
  text "Indicator PCB / REV2 (03/2026) / Designed by / Hector DLR, Peyton G, Xavier C" at 43.815,35.814 h1
  text "HV- MC" at 64.77,32.258 h1.52 r270
  text "RED GND" at 12.446,13.716 h0.76 r90
  text "HV+ MC" at 48.26,12.319 h1.52
  text "GND GREEN" at 15.748,11.557 h0.76
  text "Low Side" at 29.845,7.09 h1.52 r45
  text "High Side" at 36.862,3.644 h1.52 r44.18
  text "4mm" at 33.655,2.286 h1.52 r90
Bottom Overlay:
  text "Low Side" at 28.426,8.364 h1.52 r222.1
  text "High Side" at 36.017,4.58 h1.52 r223.89
Top Solder:
  circle w0.254: c73.8,45.339 r2.5
  circle w0.254: c4.445,4.572 r2.5
  circle w0.254: c4.445,45.212 r2.5
  circle w0.254: c73.8,4.699 r2.5
Mechanical 1:
  lines w0.254: 0,5.588 ccw(c5.588,5.588) 5.588,0 73.025,0.097 ccw(c73.025,5.685) 78.613,5.685 78.613,44.323 ccw(c73.025,44.323) 73.025,49.911 5.588,49.911 ccw(c5.588,44.323) 0,44.323 0,37.973 0,5.588